# Altium PCB Sensor_Box_PWR_DC.PCBDOC
Units mil, origin at the board's own origin, x right, y up, seen from the top; angles counter-clockwise.
Board outline 403.73 x 2876.17 mil, 2 copper layers (Top, Bot), stack 61.855 mil thick; 21 components, 11 nets, 55 pads, 26 vias.
Unrouted connection lines stored in the file: 3.
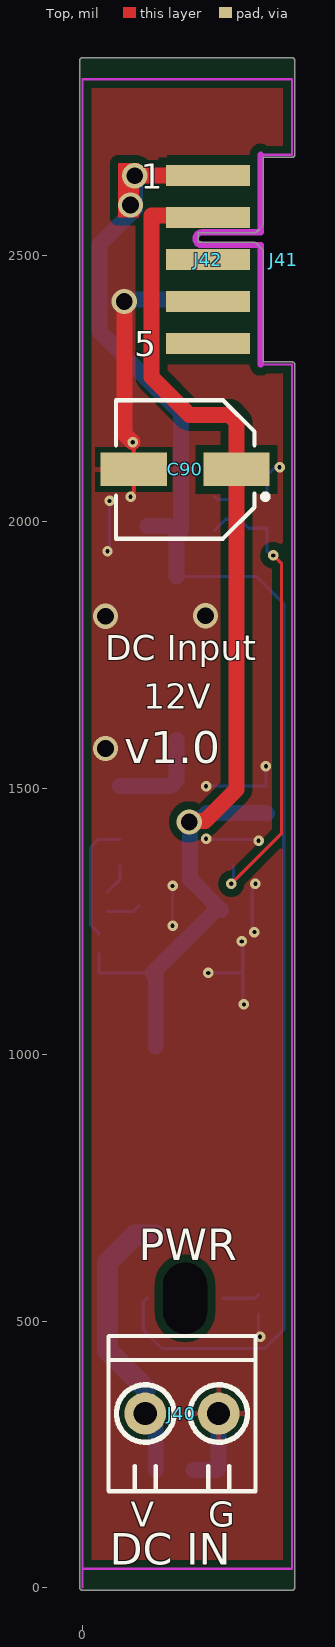
[diagram p0: Top view]
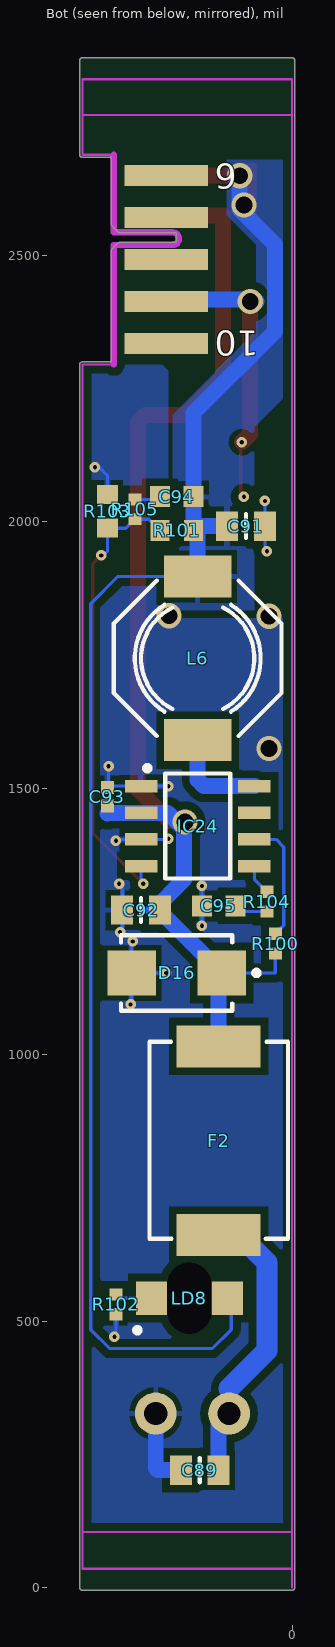
[diagram p1: Bot view, seen from below]
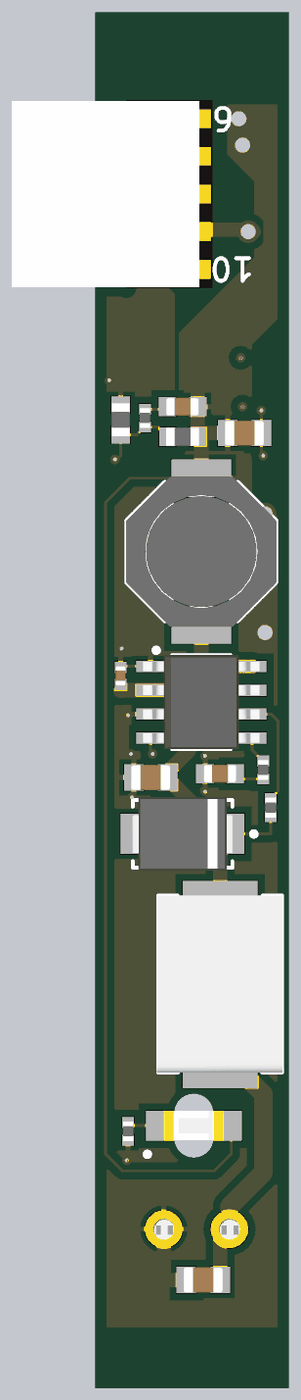
[diagram p2: 3D render of the assembled board from below, using the file's embedded part models]

## Layer stack, top to bottom
TopSolder: solder mask 0.4, Solder Resist, Dk 3.5
Top: signal copper 1.4
Dielectric1: core 59.0551, FR-4, Dk 4.8
Bot: signal copper 1.4
BottomSolder: solder mask 0.4, Solder Resist, Dk 3.5

## Board outline
0,-5.02 cw(c0,0) -5.02,0 -5.02,2866.14 cw(c0,2866.14) 0,2871.16 393.7,2871.16 cw(c393.7,2866.14) 398.72,2866.14 398.72,2688.97 cw(c393.7,2688.97) 393.7,2683.96 339.66,2683.96 339.66,2559.05 cw(c334.65,2559.05) 338.17,2555.49 338.19,2555.51 326.38,2543.7 326.4,2543.71 cw(c322.83,2547.24) 322.83,2542.23 217.61,2542.23 217.61,2524.7 322.83,2524.7 cw(c322.83,2519.68) 326.4,2523.21 326.38,2523.23 334.27,2515.34 ccw(c330.71,2511.81) 334.25,2515.36 ccw(c330.71,2511.81) 334.24,2515.37 334.27,2515.34 338.19,2511.42 338.17,2511.44 cw(c334.65,2507.87) 339.66,2507.87 339.66,2300.29 393.7,2300.29 cw(c393.7,2295.27) 398.72,2295.27 398.72,0 cw(c393.7,0) 393.7,-5.02

## Design rules (kind name [scope] priority, off if disabled: settings)
Clearance Clearance_DIFF [(InDifferentialPairClass('All Differential Pairs'))] p1: gap=5 ignorepadtopadclearanceinfootprint=FALSE except(0: Arc-Hole Track-Hole SMDPad-Hole THPad-Hole Via-Hole Fill-Hole Poly-Hole Region-Hole Text-Hole; 10: Arc-Poly Track-Poly SMDPad-Poly THPad-Poly Via-Poly Fill-Poly Poly-Poly Poly-Region Poly-Text)
Clearance [All] p2: gap=6 ignorepadtopadclearanceinfootprint=FALSE except(5: Poly-Poly; 15: Arc-Poly Track-Poly SMDPad-Poly THPad-Poly Via-Poly Fill-Poly)
DiffPairsRouting [All] p1: maxlimit=10 minlimit=5 mostfreqgap=5 toplayer_minwidth=5 toplayer_maxwidth=15 toplayer_prefwidth=10 bottomlayer_minwidth=5 bottomlayer_maxwidth=15 bottomlayer_prefwidth=10 maxuncoupledlength=500
FabricationTestPointUsage TestPointUsage [All] p1: valid=0 allowmultiple=FALSE
FabricationTestpoint Testpoint [All] p1: side=3 testpointundercomponent=TRUE minsize=40 maxsize=100 preferedsize=60 minholesize=20 maxholesize=40 preferedholesize=32 testpointgrid=1 allowsidetop=TRUE allowsidebottom=TRUE usegrid=TRUE gridtolerance=0.01
HoleSize [All] p1: absolutevalues=TRUE maxlimit=150 minlimit=1 maxpercent=80.000 minpercent=20.000
HoleToHoleClearance [All] p1: gap=1 allowstackedmicrovias=TRUE
MinimumSolderMaskSliver [All] p1: minsoldermaskwidth=0
PlaneClearance [All] p1: clearance=10
PlaneConnect [All] p1: planeconnectstyle=Direct reliefexpansion=20 reliefentries=4 reliefconductorwidth=10 reliefairgap=10
PolygonConnect PolygonConnect_pad [(InPadClass('All Pads'))] p1: connectstyle=Relief reliefconductorwidth=10 reliefentries=4 polygonreliefangle="90 Angle" airgapwidth=10
PolygonConnect [All] p2: connectstyle=Direct reliefconductorwidth=10 reliefentries=4 polygonreliefangle="45 Angle" airgapwidth=10
RoomDefinition Sensor_Box_PWR_DC [InComponentClass('Sensor_Box_PWR_DC')] p1 off: confinementstyle=ConfineIn formatcopy=TRUE lockcomponents=FALSE outline 2289.36,596.44 9484.22,596.44 9484.22,1531.48 2289.36,1531.48
RoutingVias [All] p1: holewidth=7.87 width=19.68 viastyle="Through Hole" minholewidth=7.87 minwidth=19.68 maxholewidth=28 maxwidth=50
SilkToSilkClearance [All] p1: silktosilkclearance=0
SilkToSolderMaskClearance SilkscreenOverComponentPads [IsPad] p1: minsilkscreentomaskgap=0 clearancetoexposedcopper=TRUE
SolderMaskExpansion [All] p1: expansion=2
Width [All] p1: maxlimit=50 minlimit=5 preferedwidth=5
20 further rules are at their usual default settings.

## Components (designator, comment, footprint, x,y, rotation, side; value= is the part's Value field where it differs from the comment)
C89 "10uF" CAPC2012X135N 173.23,220.47 r0 bottom
C90 "100uF" CAPAE660X540N 192.91,2098.42 r180 top
C91 "10uF" CAPC2012X135N 86.61,1992.12 r180 bottom
C92 "10uF" CAPC2012X135N 283.46,1271.65 r180 bottom
C93 "100nF" CAPC1005X55N 346.46,1484.25 r270 bottom
C94 "150pF" CAPC1608X87N 216.54,2047.24 r180 bottom
C95 "3.9nF" CAPC1608X87N 137.8,1279.53 r180 bottom
D16 "SMBJ15A" DIOM5336X265N 216.54,1153.54 r0 bottom
F2 "RFSM250 or MF-SM250-2-99" SMD150-2 137.8,838.58 r90 bottom
IC24 "NCP3170ADR2G" SOIC127P600X175-8N 177.17,1429.13 r180 bottom
J40 "TB3502s" tbx3502s 255.91,326.77 r180 top
J41 "=Family" "AVX_00 9159 010 061 916" 377.95,2492.13 r180 top
J42 "=Family" EDGE10T5B10_P200W1000L0F100X400 236.22,2334.64 r90 top
L6 "6.8uH" IND_BOURNS_SRU8043 177.17,1744.09 r90 bottom
LD8 "Green" LED_KINGBRIGHT_KPTR3216 192.91,543.31 r0 bottom
R100 "10k" RESC1005X40N 31.5,1208.66 r90 bottom
R101 "43k" RESC1608X55N 216.54,1984.25 r180 bottom
R102 "1k" RESC1005X40N 330.71,531.5 r90 bottom
R103 "8k2" RESC1608X55N 346.46,2019.68 r90 bottom
R104 "10k" RESC1005X40N 47.24,1287.4 r90 bottom
R105 "1k" RESC1005X40N 295.28,2023.62 r90 bottom

## Footprints (in the part's own frame and the unit in brackets; to place one, negate y for a bottom-side part, rotate by r counter-clockwise, add the part's x,y. Pads: shape width x height; smd on the part's side, far side on the other; paste and mask are expansions set on the pad)
"AVX_00 9159 010 061 916" [mil] "10 Contacts, 2mm Pitch, Open Ended Card Edge Connector, 9159 Series"
  body extent -197,-195 197,195, height 67
CAPAE660X540N [mm] "Capacitor, Aluminium Electrolytric, 6.6mm L X 6.6mm W X 5.4mm H, IPC Medium Density"
  rect 3.15x1.6 smd: 1(-2.45,0) 2(2.45,0)
  silkscreen extent -3.95,-3.3 3.3,3.3, body extent -3.9,-3.4 3.9,3.4, height 5.7
CAPC1005X55N [mm] "Chip Capacitor, Body 1.0x0.55mm, IPC Medium Density"
  rect 0.62x0.62 smd: 1(-0.45,0) 2(0.45,0)
  body extent -0.52,-0.27 0.53,0.28, height 0.55
CAPC1608X87N [mm] "Chip Capacitor, Body 1.6x0.8mm IPC Medium Density"
  rect 0.95x1 smd: 1(-0.8,0) 2(0.8,0)
  body extent -0.87,-0.47 0.88,0.48, height 0.87
CAPC2012X135N [mm] "Chip Capacitor, Body 2.0x1.25mm, IPC Medium Density"
  rect 1.05x1.4 smd: 1(-0.9,0) 2(0.9,0)
  silkscreen extent 0,-0.58 0,0.58, body extent -1.05,-0.67 1.05,0.68, height 1.25
DIOM5336X265N [mm] "DO-214-AA/SMB Diode, Molded Body; 5.34mm L X 3.625mm W X 2.65mm H, IPC Medium Density"
  rect 2.3x2.15 smd: 1(-2.15,0) 2(2.15,0)
  silkscreen extent -3.92,-1.8 2.65,1.8, body extent -2.7,-1.95 2.7,1.95, height 2.4
EDGE10T5B10_P200W1000L0F100X400 [mm] "10 contacts Board Edge Connector, First Left Top Pad 5, First Left Bottom Pad 10, Pitch 2mm, Length 0mm, Width 10mm, Finger Lenght 4mm, Finger Width 1mm"
  rect 1x4 smd paste-0.5: 1(8,0) 2(6,0) 3(4,0) 4(2,0) 5(0,0)
  rect 1x4 smd far side paste-0.5: 6(8,0) 7(6,0) 8(4,0) 9(2,0) 10(0,0)
  KeepOutLayer lines w0.3: -1,-2.5 4.7,-2.5 4.7,0.3 cw(c5,0.3) 5.3,0.3 5.3,-2.5 9,-2.5
IND_BOURNS_SRU8043 [mm] "SMD Inductor Body Width 8.3mm Body Lenght 8.3mm Height 4.6mm"
  rect 2x3.2 smd: 1(-3.9,0) 2(3.9,0)
  silkscreen extent -3.71,-4 3.71,4, body extent -4,-4 4,4, height 4.3
LED_KINGBRIGHT_KPTR3216 [mm] "Reverse Mount LED 3216, Hole 2.1x2.3mm 0.35mm Height"
  rect 1.5x1.6 smd: 1(1.8,0) 2(-1.8,0)
  oval 1.9x3.2 hole 2.1 slot 3.4 at 90 deg unplated mask+0.1: 3(0,0)
  silkscreen extent 2.35,1.4 2.6,1.65, body extent -1.6,-0.8 1.6,0.8, height 0.25
RESC1005X40N [mm] "Chip Resistor, EIA 0402, Metric 1005, Body 1.0x0.5mm, IPC Medium Density"
  rect 0.58x0.62 smd: 1(-0.47,0) 2(0.47,0)
  body extent -0.52,-0.27 0.53,0.28, height 0.4
RESC1608X55N [mm] "Chip Resistor, EIA 0603, Metric 1608, Body 1.6x0.8mm, IPC Medium Density"
  rect 0.9x1 smd: 1(-0.8,0) 2(0.8,0)
  body extent -0.87,-0.47 0.88,0.48, height 0.55
SMD150-2 [mm]
  rect 2x4 smd: 1(-4.5,0) 2(4.5,0)
  silkscreen extent -4.67,-3.3 4.72,3.3, body extent -4.67,-3.33 4.73,3.38, height 3
SOIC127P600X175-8N [mm] "SOIC 8, Pitch 1.27mm - Body 4x5mm, IPC Medium Density"
  rect 1.55x0.6 smd: 1(-2.7,1.905) 2(-2.7,0.635) 3(-2.7,-0.635) 4(-2.7,-1.905) 5(2.7,-1.905) 6(2.7,-0.635) 7(2.7,0.635) 8(2.7,1.905)
  silkscreen extent -2.53,-2.5 1.55,2.88, body extent -3.1,-2.5 3.1,2.5, height 1.75
tbx3502s [mm] "2x terminal blocks 3.5mm, 9A, 130V (Maritex)"
  round 2 hole 1.1: 1(0,0) 2(3.5,0)
  silkscreen extent -1.75,-3.7 5.25,3.7, body extent -1.97,-3.66 5.53,3.64, height 8.5

## Part data
C89 C91 C92: library part CC0805_10UF_16V_10%_X5R, "Non-polarised capacitor", Case=0805, Manufacturer=GENERIC, Manufacturer1 ComponentHeight=1.4mm, Manufacturer1 Example=KEMET, Manufacturer1 Part Number=C0805C106K4PAC, Tolerance=±10%, Voltage=16V, Author="CERN DEM JLC", Component Type=Standard, CreateDate=03.12.2007, HelpURL=\\cern.ch\dfs\Applications\Altium\Datasheets\CC1206_X5R_KEMET.pdf, LatestRevisionDate=03.12.2007, Manufacturer Part Number=CC0805_10UF_16V_10%_X5R, Mounted=Yes, Part Description="SMD Multilayer Chip Ceramic Capacitor", Part Number=CC0805_10UF_16V_10%_X5R, Pin Count=2, Sense=No, SMD=Yes, Socket=No, Status=Preferred, TC=X5R
C90: library part CAE660-540_100UF_16V_20%, "Polarised capacitor", Case=D, Manufacturer=PANASONIC, Manufacturer Part Number=EEEFK1C101AP, Tolerance=±20%, Voltage=16V, Author="CERN DEM JLC", ComponentHeight=5.8mm, Component Type=Standard, CreateDate=03.12.2007, HelpURL=\\cern.ch\dfs\Applications\Altium\Datasheets\CAE_PANASONIC_FK.pdf, LatestRevisionDate=05.11.2014, Mounted=Yes, Part Description="Aluminum Electrolytic SMT Capacitor", Part Number=CAE660-540_100UF_16V_20%, Pin Count=2, Sense=No, SMD=Yes, Socket=No, Status="Not Recommended"
C93: library part CC0402_100NF_16V_10%_X5R, "Non-polarised capacitor", Case=0402, Manufacturer=GENERIC, Manufacturer1 ComponentHeight=0.55mm, Manufacturer1 Example=MURATA, Manufacturer1 Part Number=GRM155R61C104KA88D, Tolerance=±10%, Voltage=16V, Author="CERN DEM JLC", Component Type=Standard, CreateDate=10.12.2013, HelpURL=\\cern.ch\dfs\Applications\Altium\Datasheets\CC0402_X5R_MURATA_GRM.pdf, LatestRevisionDate=10.12.2013, Manufacturer Part Number=CC0402_100NF_16V_10%_X5R, Mounted=Yes, Part Description="SMD Multilayer Chip Ceramic Capacitor", Part Number=CC0402_100NF_16V_10%_X5R, Pin Count=2, Sense=No, SMD=Yes, Socket=No, Status=None, TC=X5R
C94: library part CC0603_150PF_50V_1%_NP0, "Non-polarised capacitor", Case=0603, Manufacturer=GENERIC, Manufacturer1 ComponentHeight=0.7mm, Manufacturer1 Example=PHYCOMP, Manufacturer1 Part Number=CC0603FRNPO9BN151, Tolerance=±1%, Voltage=50V, Author="CERN DEM MR", Component Type=Standard, CreateDate=17.02.2016, HelpURL=\\cern.ch\dfs\Applications\Altium\Datasheets\CC0805_NP0_PHYCOMP_16VTO50V.pdf, LatestRevisionDate=17.02.2016, Manufacturer Part Number=CC0603_150PF_50V_1%_NP0, Mounted=Yes, Part Description="SMD Multilayer Chip Ceramic Capacitor", Part Number=CC0603_150PF_50V_1%_NP0, Pin Count=2, Sense=No, SMD=Yes, Socket=No, Status=None, TC=C0G/NP0
C95: library part CC0603_3.9NF_50V_5%_X7R, "Non-polarised capacitor", Case=0603, Manufacturer=GENERIC, Manufacturer1 ComponentHeight=0.87mm, Manufacturer1 Example=PHYCOMP, Manufacturer1 Part Number=223858615631, Tolerance=±5%, Voltage=50V, Author="CERN DEM JLC", Component Type=Standard, CreateDate=03.12.2007, HelpURL=\\cern.ch\dfs\Applications\Altium\Datasheets\CC0603_X7R_PHYCOMP.pdf, LatestRevisionDate=03.12.2007, Manufacturer Part Number=CC0603_3.9NF_50V_5%_X7R, Mounted=Yes, Part Description="SMD Multilayer Chip Ceramic Capacitor", Part Number=CC0603_3.9NF_50V_5%_X7R, Pin Count=2, Sense=No, SMD=Yes, Socket=No, Status=Preferred, TC=X7R
D16: "Zener Diode", Case=DO-214AA, Manufacturer="FAIRCHILD SEMICONDUCTOR", Power=600W, Voltage=15V, Author="CERN DEM JLC", Bonding=No, ComponentHeight=2.65mm, Component Type=Standard, CreateDate=08.12.2008, Device=SMBJ15A, HelpURL=\\cern.ch\dfs\Applications\Altium\Datasheets\SMBJ.pdf, LatestRevisionDate=19.12.2011, Manufacturer Part Number=SMBJ15A, Mounted=Yes, PackageDescription="DO-214-AA/SMB Diode, Molded Body; 5.34mm L X 3.625mm W X 2.65mm H, IPC Medium Density", Part Description="Uni-Directional Transient Voltage Suppressor Diode", Part Number=SMBJ15A, Pin Count=2, PressFit=No, Sense=No, SMD=Yes, Socket=No
F2: library part F_PTC_9.5x6mm, "2.50A/15V", Supplier Part Number 1=61J7435, Supplier 1=Newark
IC24: "Synchronous PWM Switching Converter", Case=SOIC8, Manufacturer="ON SEMICONDUCTOR", Author="CERN DEM MR", Bonding=No, ComponentHeight=1.75mm, Component Type=Standard, CreateDate=30.05.2016, Device=NCP3170ADR2G, HelpURL=\\cern.ch\dfs\Applications\Altium\Datasheets\NCP3170ADR2G.pdf, LatestRevisionDate=30.05.2016, Manufacturer Part Number=NCP3170ADR2G, Mounted=Yes, PackageDescription="SOIC 8, Pitch 1.27mm - Body 4x5mm, IPC Medium Density", Part Description="Synchronous PWM Switching Converter", Part Number=NCP3170ADR2G, Pin Count=8, PressFit=No, Sense=No, SMD=Yes, Socket=No
J40: library part CON_TB2, "Terminal Block"
J41: library part "AVX_00 9159 010 061 916", "Open Ended Card Edge Connector, 9159 Series", Manufacturer=AVX, Manufacturer Part Number="00 9159 010 061 916", Author="CERN DEM MR", ComponentHeight=1.6mm, Component Type=Standard, CreateDate=13.02.2018, HelpURL="\\cern.ch\dfs\Applications\Altium\Datasheets\AVX_00 9159 010 061 916.pdf", LatestRevisionDate=13.02.2018, Mounted=Yes, Part Description="10 Contacts, 2mm Pitch, Open Ended Card Edge Connector, 9159 Series", Part Number="AVX_00 9159 010 061 916", Pin Count=10, PressFit=No, Sense=No, SMD=No, Socket=No, Status=None
J42: library part EDGE10T5B10_P200W1000L0F100X400, "PCB Edge Connector 10 (2x5)", Author="CERN DEM MR", ComponentHeight=0mm, Component Type="Standard (No BOM)", CreateDate=14.02.2018, HelpURL=\\cern.ch\dfs\Applications\Altium\Datasheets\EDGE10T5B10_P200W1000L0F100X400.pdf, LatestRevisionDate=14.02.2018, Mounted=No, Part Description="10 Contacts Board Edge Connector, Pitch 2mm, Length 0mm, Width 10mm, Finger Lenght 4mm, Finger Width 1mm", Part Number=EDGE10T5B10_P200W1000L0F100X400, Pin Count=10, PressFit=No, Sense=No, SMD=No, Socket=No, Status=None
L6: library part IND_6.8UH_30%_BOURNS_SRU8043, "Inductor", Manufacturer=BOURNS, Manufacturer Part Number=SRU8043-6R8Y, Power=3.8A, Resistance=0.0224R, Tolerance=±30%, Author="CERN DEM JMW", ComponentHeight=4.6mm, Component Type=Standard, CreateDate=06.08.2015, HelpURL=\\cern.ch\dfs\Applications\Altium\Datasheets\IND_BOURNS_SRU8043.pdf, LatestRevisionDate=06.08.2015, Mounted=Yes, Part Description="Shielded SMD Power Inductor", Part Number=IND_6.8UH_30%_BOURNS_SRU8043, Pin Count=2, Sense=No, SMD=Yes, Socket=No, Status=None
LD8: library part LED_KINGBRIGHT_KPTR-3216CGCK, "LED Green 1A 2C", Manufacturer=KINGBRIGHT, Manufacturer Part Number=KPTR-3216CGCK, Author="CERN DEM MR", Bonding=No, Color=Green, ComponentHeight=0.35mm, Component Type=Standard, CreateDate=15.02.2016, HelpURL=\\cern.ch\dfs\Applications\Altium\Datasheets\LED_KINGBRIGHT_KPTR-3216CGCK.pdf, LatestRevisionDate=15.02.2016, Mounted=Yes, PackageDescription="Reverse Mount LED 3216, Hole 2.1x2.3mm 0.35mm Height", Part Description="Reverse Mount LED 1.4x1.6mm Green", Part Number=LED_KINGBRIGHT_KPTR-3216CGCK, Pin Count=2, PressFit=No, Sense=No, SMD=Yes, Socket=No
R100 R104: library part R0402_10K_1%_0.0625W_100PPM, "Resistor - 1%", Case=0402, Manufacturer=GENERIC, Manufacturer1 ComponentHeight=0.4mm, Manufacturer1 Example="YAGEO PHYCOMP", Manufacturer1 Part Number=232270671003L, Power=0.0625W, Tolerance=±1%, Author="CERN DEM JLC", Component Type=Standard, CreateDate=03.12.2007, HelpURL=\\cern.ch\dfs\Applications\Altium\Datasheets\R0402_Phycomp_RC0402.pdf, LatestRevisionDate=17.10.2012, Manufacturer Part Number=R0402_10K_1%_0.0625W_100PPM, Mounted=Yes, Part Description="General Purpose Thick Film Chip Resistor", Part Number=R0402_10K_1%_0.0625W_100PPM, Pin Count=2, PressFit=No, Sense=No, SMD=Yes, Socket=No, Status="Not Recommended", TC=±100ppm/°C
R101: library part R0603_43K_1%_0.1W_100PPM, "Resistor - 1%", Case=0603, Manufacturer=GENERIC, Manufacturer1 ComponentHeight=0.55mm, Manufacturer1 Example="NIC COMPONENT", Manufacturer1 Part Number=NRC06F4302TRF, Power=0.1W, Tolerance=±1%, Author="CERN DEM JLC", Component Type=Standard, CreateDate=03.12.2007, HelpURL=\\cern.ch\dfs\Applications\Altium\Datasheets\R0603_NIC_NRC.pdf, LatestRevisionDate=13.03.2008, Manufacturer Part Number=R0603_43K_1%_0.1W_100PPM, Mounted=Yes, Part Description="General Purpose Thick Film Chip Resistor", Part Number=R0603_43K_1%_0.1W_100PPM, Pin Count=2, PressFit=No, Sense=No, SMD=Yes, Socket=No, Status=Preferred, TC=±100ppm/°C
R102 R105: library part R0402_1K_1%_0.0625W_100PPM, "Resistor - 1%", Case=0402, Manufacturer=GENERIC, Manufacturer1 ComponentHeight=0.4mm, Manufacturer1 Example="YAGEO PHYCOMP", Manufacturer1 Part Number=232270671002L, Power=0.0625W, Tolerance=±1%, Author="CERN DEM JLC", Component Type=Standard, CreateDate=03.12.2007, HelpURL=\\cern.ch\dfs\Applications\Altium\Datasheets\R0402_Phycomp_RC0402.pdf, LatestRevisionDate=17.10.2012, Manufacturer Part Number=R0402_1K_1%_0.0625W_100PPM, Mounted=Yes, Part Description="General Purpose Thick Film Chip Resistor", Part Number=R0402_1K_1%_0.0625W_100PPM, Pin Count=2, PressFit=No, Sense=No, SMD=Yes, Socket=No, Status="Not Recommended", TC=±100ppm/°C
R103: library part R0603_8K2_1%_0.1W_100PPM, "Resistor - 1%", Case=0603, Manufacturer=GENERIC, Manufacturer1 ComponentHeight=0.55mm, Manufacturer1 Example="NIC COMPONENT", Manufacturer1 Part Number=NRC06F8201TRF, Power=0.1W, Tolerance=±1%, Author="CERN DEM JLC", Component Type=Standard, CreateDate=03.12.2007, HelpURL=\\cern.ch\dfs\Applications\Altium\Datasheets\R0603_NIC_NRC.pdf, LatestRevisionDate=13.03.2008, Manufacturer Part Number=R0603_8K2_1%_0.1W_100PPM, Mounted=Yes, Part Description="General Purpose Thick Film Chip Resistor", Part Number=R0603_8K2_1%_0.1W_100PPM, Pin Count=2, PressFit=No, Sense=No, SMD=Yes, Socket=No, Status=Preferred, TC=±100ppm/°C

## Via types
v1: diameter 19.68, hole 7.87, Top to Bot, tented both sides, 19 vias
v2: diameter 47.24, hole 31.5, Top to Bot, tented both sides, 7 vias

## Nets (pads, with @x,y where several pads share a name; then routed paths per layer and width w, separated by ;. In a path a pad name is that pad's centre, name@x,y a point inside that pad or via, vN(x,y) a via of type N, cw(c..) or ccw(c..) an arc to the next point about the centre after c; other vN are vias at no path point)
GND: C89.1 C90.2 C91.2 C92.1 C93.1 C95.1 D16.2 IC24.1 IC24.3 J40.1 J42.9 R102.1 R103.2 | length 1503.2
  Top w6: v1(90.55,2047.24) 96.46,2053.15 C90.2 96.46,2147.64 v1(94.49,2149.61)
  Top w30: v2(78.74,2413.39) 78.74,2165.35 v1(94.49,2149.61)
  Bot w6: v1(47.24,1944.88) 51.18,1948.82 C91.2 v1(51.18,2039.37) ; v1(169.29,1242.12) C95.1 v1(169.29,1316.93) ; v1(232.28,1405.51) 233.66,1404.13 IC24.3 328.15,1404.13 v1(330.71,1401.57) ; v1(232.28,1503.94) 232.48,1504.13 IC24.1 344.29,1504.13 344.49,1503.94 v1(344.49,1541.34) ; v1(236.22,1153.54) D16.2 ; v1(299.21,1212.6) 301.18,1210.63 D16.2 ; v1(303.15,1094.49) 301.18,1096.46 D16.2 ; v1(322.84,1230.31) 318.9,1234.25 C92.1 318.9,1314.96 v1(324.8,1320.86) ; R102.1 330.71,473.6 v1(333.54,470.77) ; R103.2 346.46,2086.61 362.2,2102.36 v1(370.08,2102.36)
  Bot w30: v2@66.93,2413.39 70.87,2417.32 J42.9@232.28,2417.32 ; 208.66,220.47 251.97,220.47 255.91,224.41 J40.1
  other v2: 43.31,1574.8 43.31,1822.83 230.89,1823.83
NetC89_2: C89.2 F2.1 J40.2
NetC94_1: C94.1 R105.2 | length 49.4
  Bot w6: C94.1 253.15,2042.12 R105.2
NetC95_2: C95.2 R104.1 | length 63.5
  Bot w6: R104.1 95.67,1268.9 C95.2
NetIC24_4: IC24.4 R101.1 R103.1 R105.1 | length 869.2
  Top w6: v1(279.53,1320.86) 374.02,1415.35 374.02,1921.26 v1(358.27,1937.01)
  Bot w6: R101.1 268.9,2005.12 R105.1 312.2,1988.19 R103.1 346.46,1944.88 354.33,1937.01 v1(358.27,1937.01) ; v1(279.53,1320.86) 283.46,1324.8 IC24.4
NetIC24_5: IC24.5 R104.2 | length 58
  Bot w6: R104.2 70.87,1329.53 IC24.5
NetIC24_6: IC24.6 R100.2 | length 230.2
  Bot w6: R100.2 15.75,1242.91 15.75,1389.76 30.12,1404.13 IC24.6
NetIC24_8: IC24.8 L6.1 | length 185.9
  Bot w30: IC24.8 165.55,1504.13 177.17,1515.75 L6.1
NetLD8_1: LD8.1 R102.2 | length 69.7
  Bot w6: LD8.1 324.02,543.31 R102.2
P5V0: C91.1 C94.2 J42.1 L6.2 LD8.2 R101.2 | length 2987.6
  Top w30: v2(98.43,2649.61) 228.35,2649.61 J42.1@232.28,2653.54
  Bot w6: LD8.2 114.17,535.43 114.17,484.25 149.61,448.82 342.52,448.82 377.95,484.25 377.95,1846.46 326.77,1897.64 L6.2
  Bot w30: v2(98.43,2649.61) 98.43,2586.61 31.93,2520.12 31.93,2357.83 185.04,2204.72 C94.2 R101.2 ; C91.1 177.17,1992.12 R101.2 ; L6.2 177.17,1976.38 R101.2
  other v2: 90.55,2594.49
P12V0: C90.1 C92.2 C93.2 D16.1 F2.2 IC24.2 J42.2 R100.1 | length 2171.6
  Top w30: v2@218.05,1438.52 229.86,1438.52 289.37,1498.03 C90.1 289.37,2187.01 275.59,2200.79 200.79,2200.79 129.92,2271.65 129.92,2574.8 J42.2@232.28,2574.8
  Bot w6: R100.1 31.5,1153.54 D16.1
  Bot w30: F2.2 137.8,1147.64 D16.1 250,1271.65 259.84,1271.65 202.44,1329.05 202.44,1422.91 233.66,1454.13 IC24.2 345.08,1454.13 346.46,1452.76
  other v2: 200.79,1437.01
pads on no net: IC24.7 J42.3 J42.4 J42.5 J42.6 J42.7 J42.8 J42.10 LD8.3
copper on no net: | length 539
  Bot w30: 118.11,374.02 118.11,326.77 137.8,307.08 137.8,220.47
  Bot w39.37: 118.11,374.02 47.24,444.88 47.24,610.24 98.42,661.42 137.8,661.42

## Polygon pours and split planes (outlines as drawn)
P5V0 on Bot "Signal Layer 1-No Net 1" (solid, remove dead copper, pour order 2): 122.43,2679.86 122.43,2575.19 66.93,2519.68 66.93,2358.27 224.41,2200.79 224.41,1839.43 224.64,1839.2 220.08,1834.64 70.87,1834.64 70.87,2177.16 0,2248.03 0,2677.16 2.7,2679.86
GND on Bot "Signal Layer 1-No Net 1" (solid, remove dead copper, pour order 4): 0,0 393.7,0 393.7,2295.27 244.09,2295.27 232.28,2283.46 232.28,1834.64 236.22,1830.71 224.41,1818.9 0,1818.9
GND on Top "Signal Layer 1-No Net 1" (solid, remove dead copper, pour order 0): 0,0 393.7,0 393.7,2295.27 157.48,2295.27 158.56,2688.97 393.7,2688.97 393.7,2866.14 0,2866.14

## Keep-outs
Top:
  lines w3.94: 0,35.43 393.7,35.43 ; 0,2830.71 393.7,2830.71
Bot:
  lines w3.94: 0,104.33 393.7,104.33 ; 0,2763.78 393.7,2763.78
KeepOutLayer:
  lines w3.94: 0,0 0,2830.71 ; 0,35.43 393.7,35.43 ; 0,2830.71 393.7,2830.71 ; 0,2830.71 0,2830.71 ; 393.7,35.43 393.7,35.43 ; 393.7,35.43 393.7,2295.27 ; 393.7,2295.27 393.7,2295.27 ; 393.7,2295.27 334.65,2295.27 334.65,2519.68 212.6,2519.68 212.6,2543.31 334.65,2543.31 334.65,2688.97 393.7,2688.97 ; 393.7,2688.97 393.7,2688.97 ; 393.7,2688.97 393.7,2830.71 ; 393.7,2830.71 393.7,2830.71

## Other copper
Top:
  rectangle net P5V0: 66.93,2570.87 106.3,2673.23

## Silkscreen, mask and mechanical layers (free items; w line width, h text height)
TopOverlay:
  text "DC Input" at 43.31,1740.16 h47.24
  text "12V" at 114.17,1649.61 h47.24
  text "v1.0" at 78.74,1547.24 h60
  text "PWR" at 106.3,614.17 h59.06
  text "V" at 90.55,114.17 h47.24
  text "G" at 236.22,114.17 h47.24
  text "DC IN" at 51.18,43.31 h59.06
Mechanical1:
  lines w10: 381.89,2295.27 334.65,2295.27 ; 381.89,2688.97 334.65,2688.97 ; 0,2866.14 393.7,2866.14 ; 0,2866.14 0,0 393.7,0 393.7,2295.27 334.65,2295.27 ; 0,2866.14 393.7,2866.14 ; 334.65,2295.27 334.65,2507.87 330.71,2511.81 322.83,2519.68 212.6,2519.68 212.6,2543.31 326.77,2543.31 334.65,2551.18 334.65,2688.97 ; 334.65,2688.97 393.7,2688.97 ; 334.65,2688.97 393.7,2688.97 ; 334.65,2688.97 393.7,2688.97 ; 393.7,2688.97 393.7,2866.14

## Text inside footprints (layer, text, board x,y; h text height)
J42: BottomOverlay "6" at 104.33,2672.44 h47.24 r180; BottomOverlay "10" at 62.99,2358.27 h47.24 r180; TopOverlay "1" at 109.25,2625.2 h47.24; TopOverlay "5" at 97.44,2311.02 h47.24